# Altium PCB ControlBrickLogic2_1.PcbDoc
Units mm, origin at the board's own origin, x right, y up, seen from the top; angles counter-clockwise.
Board outline 37.75 x 63 mm, 2 copper layers (Top Layer, Bottom Layer); 40 components, 129 nets, 137 pads, 18 vias.
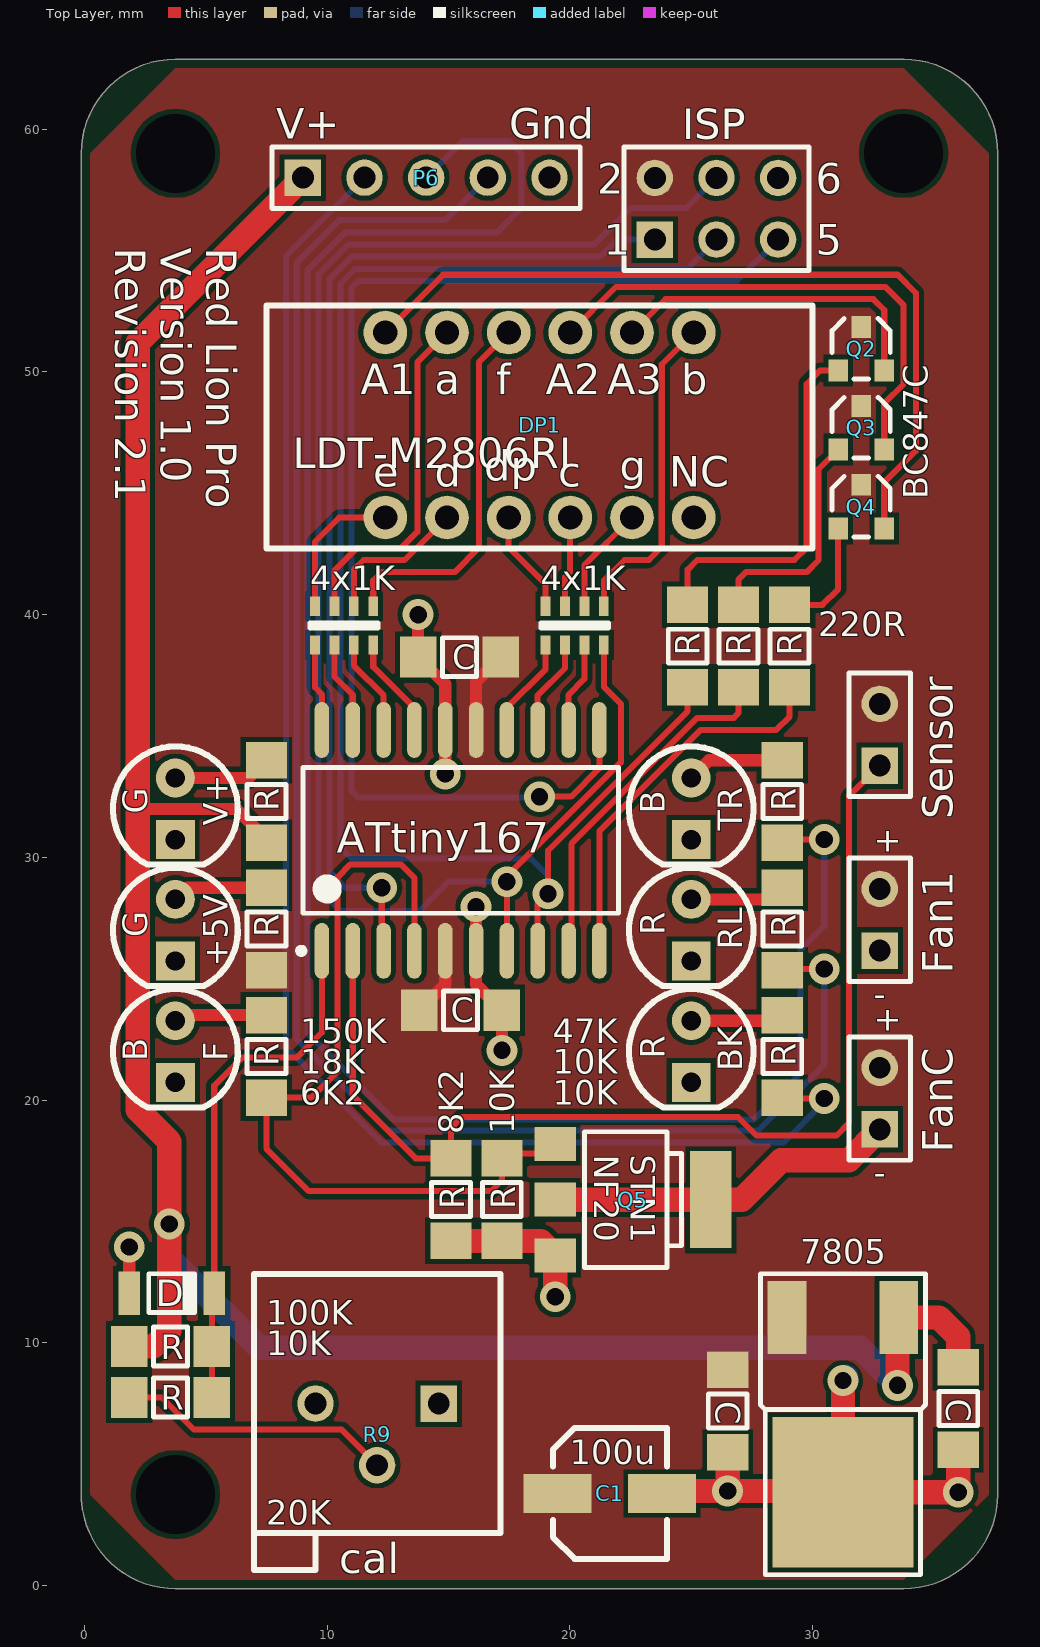
[diagram p0: Top Layer view]
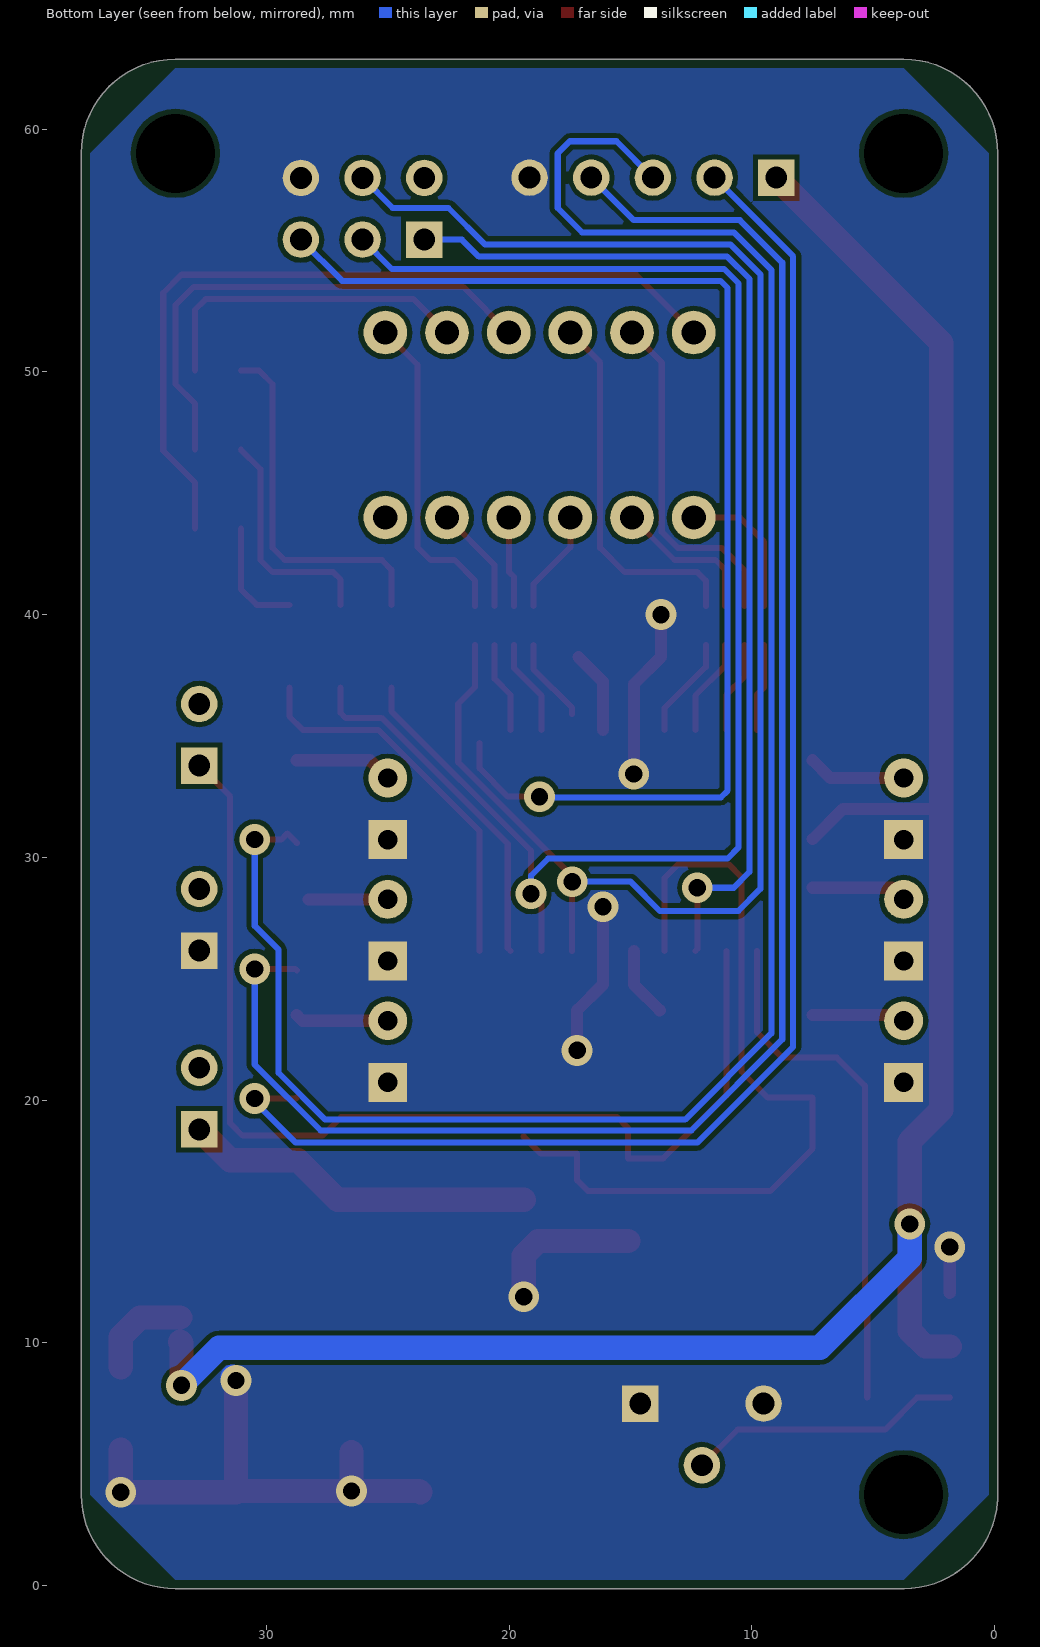
[diagram p1: Bottom Layer view, seen from below]

## Layer stack, top to bottom
Top Solder: solder mask 0.0102, Solder Resist, Dk 3.5
Top Layer: signal copper 0.0356
Dielectric 1: dielectric 0.32, FR-4, Dk 4.8
Bottom Layer: signal copper 0.0356
Bottom Solder: solder mask 0.0102, Solder Resist, Dk 3.5

## Board outline
-0.115,3.446 ccw(c3.75,3.75) 3.749,-0.127 ccw(c3.75,0) 3.75,-0.127 33.75,-0.127 ccw(c33.75,3.75) 37.627,3.75 37.627,59 ccw(c33.75,59) 33.751,62.877 ccw(c33.75,62.75) 33.75,62.877 3.75,62.877 ccw(c3.75,59) -0.127,59 -0.127,3.5 ccw(c0,3.5)

## Design rules (kind name [scope] priority, off if disabled: settings)
Clearance [All] p1: gap=0.2
ComponentClearance [All] p1 off: gap=0.254 collisioncheckmode=3 verticalgap=0.254 showdistances=FALSE
Height [All] p1 off: minheight=0 maxheight=25.4 prefheight=12.7
PlaneConnect [All] p1: planeconnectstyle=Direct reliefexpansion=0.508 reliefentries=4 reliefconductorwidth=0.254 reliefairgap=0.254
PolygonConnect [All] p1: connectstyle=Direct reliefconductorwidth=0.254 reliefentries=4 polygonreliefangle="90 Angle" airgapwidth=0.254
RoutingVias [All] p1: holewidth=0.711 width=1.27 viastyle="Through Hole" minholewidth=0.711 minwidth=1.27 maxholewidth=0.711 maxwidth=1.27
SolderMaskExpansion [All] p1: expansion=0.102
Width [All] p1: maxlimit=300 minlimit=0.01 preferedwidth=1
27 further rules are at their usual default settings.

## Components (designator, comment, footprint, x,y, rotation, side; value= is the part's Value field where it differs from the comment)
4x1K "1K" ResNet1206_8 9.5,38.75 r0 top (schematic designator R12)
4x1K "1K" ResNet1206_8 19,38.75 r0 top (schematic designator R13)
7805 "+5V" DPAK 31.25,3.85 r90 top (schematic designator VR1)
+5V "G" "LED 2.54" 3.75,27 r0 top locked (schematic designator D18)
ATtiny167 "ATtiny167-15SZ" 20TG_N 15.5,30.7 r90 top (schematic designator U1)
BK "R" "LED 2.54" 25,22 r0 top locked (schematic designator D21)
C "CapSMD" 1206 36,5.6 r90 top (schematic designator C2)
C "CapSMD" 1206 26.5,5.5 r90 top (schematic designator C3)
C "CapSMD" 1206 17.2,23.7 r180 top (schematic designator C4)
C "CapSMD" 1206 13.75,38.25 r0 top (schematic designator C5)
C1 "100u" "SMDcap 5mm" 19.5,3.8 r270 top
D "5.1V" MiniMELF 1.85,12.05 r0 top (schematic designator D16)
DP1 "LDT-M2806RI" LDT-M2806RI 12.4,44 r0 top locked
F "B" "LED 2.54" 3.75,22 r0 top locked (schematic designator D22)
Fan1 "Permanent Fan" HDR1X2 32.766,28.702 r270 top (schematic designator P7)
FanC "Switched Fan" HDR1X2 32.766,21.336 r270 top (schematic designator P10)
ISP "ISP" HDR2X3 23.5,55.45 r0 top (schematic designator P9)
P6 "Inwards" HDR1X5 9,58 r0 top locked
Q2 "BC847C" SOT23 32,49.5 r0 top
Q3 "BC847C" SOT23 32,46.25 r0 top
Q4 "BC847C" SOT23 32,43 r0 top
Q5 "Mosfet" SOT223 18.5,15.9 r270 top
R "100K" 1206 5.25,9.85 r180 top (schematic designator R4)
R "10K" 1206 1.85,7.75 r0 top (schematic designator R5)
R "ResSMD" 1206 24.85,37 r90 top (schematic designator R6)
R "ResSMD" 1206 26.95,37 r90 top (schematic designator R7)
R "220R" 1206 29.05,37 r90 top (schematic designator R8)
R "150K" 1206 7.5,34 r270 top (schematic designator R10)
R "18K" 1206 7.5,28.75 r270 top (schematic designator R11)
R "10K" 1206 28.75,23.5 r270 top (schematic designator R16)
R "10K" 1206 28.75,28.75 r270 top (schematic designator R14)
R "47K" 1206 28.75,34 r270 top (schematic designator R15)
R "8K2" 1206 15.1,14.2 r90 top (schematic designator R17)
R "10K" 1206 17.2,14.2 r90 top (schematic designator R18)
R "6K2" 1206 7.5,23.5 r270 top (schematic designator R19)
R9 "cal" Tr3296P 14.6,7.5 r180 top
RL "R" "LED 2.54" 25,27 r0 top locked (schematic designator D19)
Sensor "Thermistor" HDR1X2 32.766,36.322 r270 top (schematic designator P8)
TR "B" "LED 2.54" 25,32 r0 top locked (schematic designator D20)
V+ "G" "LED 2.54" 3.75,32 r0 top locked (schematic designator D17)

## Footprints (in the part's own frame and the unit in brackets; to place one, negate y for a bottom-side part, rotate by r counter-clockwise, add the part's x,y. Pads: shape width x height; smd on the part's side, far side on the other; paste and mask are expansions set on the pad)
20TG_N [mm] "SOIC, 20-Leads, Body 12.8x7.5mm, Pitch 1.27mm, IPC Medium Density"
  oval 2.3x0.6 smd: 1(-4.55,5.715) 2(-4.55,4.445) 3(-4.55,3.175) 4(-4.55,1.905) 5(-4.55,0.635) 6(-4.55,-0.635) 7(-4.55,-1.905) 8(-4.55,-3.175) 9(-4.55,-4.445) 10(-4.55,-5.715) 11(4.55,-5.715) 12(4.55,-4.445) 13(4.55,-3.175) 14(4.55,-1.905) 15(4.55,-0.635) 16(4.55,0.635) 17(4.55,1.905) 18(4.55,3.175) 19(4.55,4.445) 20(4.55,5.715)
  silkscreen extent -4.67,-6.5 3,6.69, body extent -3.75,-6.5 3.75,6.5, height 2.65
1206 [mm] "1206 Passive Component"
  rect 1.5x1.7 smd: 1(0,0) 2(3.4,0)
  silkscreen extent 1,-0.8 2.4,0.8
DPAK [mm] "DPAK w/out pin 2"
  rect 3x1.6 smd: 1(7.2,-2.3) 3(7.2,2.3)
  rect 6.2x5.8 smd: 2(0,0)
  silkscreen extent -3.4,-3.4 9,3.4
HDR1X2 [mm] "Connector; Header; 2 Position"
  round 1.5 hole 0.9: 1(0,0)
  rect 1.5x1.5 hole 0.9: 2(2.54,0)
  silkscreen extent -1.27,-1.27 3.81,1.27
HDR1X5 [mm] "Connector; Header; 5 Position"
  rect 1.5x1.5 hole 0.9: 1(0,0)
  round 1.5 hole 0.9: 2(2.54,0) 3(5.08,0) 4(7.62,0) 5(10.16,0)
  silkscreen extent -1.27,-1.27 11.43,1.27
HDR2X3 [mm] "Connector; Header; 3x2 Position"
  rect 1.5x1.5 hole 0.9: 1(0,0)
  round 1.5 hole 0.9: 2(0,2.54) 3(2.54,0) 4(2.54,2.54) 5(5.08,0) 6(5.08,2.54)
  silkscreen extent -1.27,-1.27 6.35,3.81
LDT-M2806RI [mm] "7-Segment Display"
  round 1.8 hole 1: 1(0,0) 2(2.54,0) 3(5.08,0) 4(7.62,0) 5(10.16,0) 6(12.7,0) 7(12.7,7.62) 8(10.16,7.62) 9(7.62,7.62) 10(5.08,7.62) 11(2.54,7.62) 12(0,7.62)
  silkscreen extent -4.9,-1.27 17.6,8.73
"LED 2.54" [mm] "LED; 2 Leads"
  round 1.6 hole 0.8: 1(0,1.27)
  rect 1.6x1.6 hole 0.8: 2(0,-1.27)
  silkscreen extent -2.57,-2.3 2.57,2.57
MiniMELF [mm] "MiniMELF"
  rect 0.9x1.8 smd: 1(0,0) 2(3.5,0)
  silkscreen extent 0.8,-0.8 2.7,0.8
ResNet1206_8 [mm] "Resistor Network 1206 8 pins"
  rect 0.4x0.8 smd: 1(0,0) 2(0.8,0) 3(1.6,0) 4(2.4,0) 5(2.4,1.6) 6(1.6,1.6) 7(0.8,1.6) 8(0,1.6)
  silkscreen extent -0.2,0.7 2.6,0.9
"SMDcap 5mm" [mm] "Electrolytic 5mm SMD cap"
  rect 1.6x2.8 smd: 1(0,0) 2(0,4.3)
  silkscreen extent -2.7,-0.2 2.7,4.5
SOT23 [mm] "SOT23 SMD package"
  rect 0.8x0.9 smd: 1(-0.95,0.55) 2(0.95,0.55) 3(0,2.35)
  silkscreen extent -1.2,0.2 1.2,2.7
SOT223 [mm] "SOT223"
  rect 1.4x1.7 smd: 1(-2.3,0.9) 2(0,0.9) 3(2.3,0.9)
  rect 4x1.7 smd: 4(0,7.3)
  silkscreen extent -2.8,2.1 2.8,6.1
Tr3296P [mm] "Bourns 3296 3/8 Trimmer type P"
  rect 1.5x1.5 hole 0.9: 1(0,0)
  round 1.5 hole 0.9: 2(2.54,2.54) 3(5.08,0)
  silkscreen extent -2.54,-5.33 7.62,6.86

## Part data
4x1K 4x1K: library part ResNet4, "Isolated Resistor Network"
7805: library part "Volt Reg", "Voltage Regulator"
+5V BK F RL TR V+: library part LED1, "Typical RED GaAs LED"
ATtiny167: "8-bit Automotive AVR Microcontroller, 16KB Flash, 512 Bytes EEPROM, 512 Bytes SRAM, Automotive Grade (-40°C to +125°C), 20-Pin SOIC"
C C C C: "Capacitor"
C1: library part "Cap Pol2", "Polarized Capacitor (Axial)"
D: library part "D Zener", "Zener Diode"
DP1: library part 7Seg
Fan1 FanC Sensor: library part "Header 2", "Header, 2-Pin"
ISP: library part "Header 3X2", "Header, 3-Pin, Dual row"
P6: library part "Header 5", "Header, 5-Pin"
Q2 Q3 Q4: "NPN General Purpose Amplifier"
Q5: library part STN1NF20, "N-Channel MOSFET, SOT223"
R R R R R R R R R R R: library part ResSMD, "Resistor"
R R: "Resistor"
R9: library part RPot, "Potentiometer"

## Free pads (board coordinates)
  round 2.5 hole 3.25: 2(3.75,3.75)
  round 0 hole 3.25: 3(3.75,59) 4(33.75,59)

## Via types
v1: diameter 1.27, hole 0.711, Top Layer to Bottom Layer, 18 vias

## Nets (pads, with @x,y where several pads share a name; then routed paths per layer and width w, separated by ;. In a path a pad name is that pad's centre, name@x,y a point inside that pad or via, vN(x,y) a via of type N, cw(c..) or ccw(c..) an arc to the next point about the centre after c; other vN are vias at no path point)
+5V: 7805.3 ATtiny167.5 ATtiny167.15 C1.1 C.2@13.8,23.7 C.2@17.15,38.25 C.2@26.5,8.9 Fan1.1 FanC.1 ISP.2 Q2.3 Q3.3 Q4.3 R.2@7.5,25.35 Sensor.1 | length 6.3
  Top Layer w0.5: C.2@13.8,23.7 14.865,24.765 ATtiny167.5 ; ATtiny167.15 16.135,37.235 C.2@17.15,38.25
GND: 7805.2 +5V.2 ATtiny167.6 ATtiny167.16 BK.2 C1.2 C.1 D.1 F.2 Fan1.2 ISP.6 P6.5 Q5.3 R9.1 R9.3 R.1@15.1,14.2 R.1@17.2,14.2 RL.2 TR.2 V+.2 | length 42.1
  Top Layer w0.5: D.1 v1(1.85,13.95) ; v1(13.75,40) 13.75,38.25 14.865,37.135 ATtiny167.16 v1(14.865,33.435) ; v1(16.135,27.965) ATtiny167.6 16.135,24.765 17.2,23.7 v1(17.2,22.05)
  Top Layer w1: R.1@15.1,14.2 17.2,14.2 18.8,14.2 Q5.3 v1(19.4,11.9) ; C1.2@23.65,3.85 23.7,3.9 v1(26.5,3.9) ; C.1@26.5,5.5 v1(26.5,3.9) ; v1(31.25,8.45) 7805.2 ; C.1@36,5.6 v1(36,3.85) 7805.2 ; v1(26.5,3.9) 31.2,3.9 7805.2
  Bottom Layer w0.5: v1(14.865,33.435) v1@14.9,33.4
  Bottom Layer w1: v1(31.25,8.45) v1@31.4,8.6
NetD1_1: 
NetD1_2: 
NetD2_1: 
NetD2_2: 
NetD3_1: 
NetD3_2: 
NetD4_1: 
NetD4_2: 
NetD5_1: 
NetD5_2: 
NetD6_2: 
NetD8_1: 
NetD10_1: 
NetD12_2: 
NetD13_2: 
NetD14_2: 
NetD15_1: 
NetD16_2: ATtiny167.1 D.2 R.1@5.25,9.85 R.2@5.25,7.75 | length 21.6
  Top Layer w0.25: R.2@5.25,7.75 5.25,11.95 D.2 5.35,20.6 6.5,21.75 8.75,21.75 9.785,22.785 ATtiny167.1
NetD17_1: R.1@28.75,28.75 RL.1 | length 3.3
  Top Layer w0.5: RL.1 R.1@28.27,28.27
NetD18_1: R.1@28.75,34 TR.1 | length 4.1
  Top Layer w0.5: TR.1 25.73,34 R.1@28.75,34
NetD19_1: BK.1 R.1@28.75,23.5 | length 3.8
  Top Layer w0.5: BK.1 28.52,23.27 R.1@28.75,23.5
NetD20_1: R.1@7.5,34 V+.1 | length 4.1
  Top Layer w0.5: V+.1 6.77,33.27 R.1@7.5,34
NetD21_1: +5V.1 R.1@7.5,28.75 | length 3.9
  Top Layer w0.5: +5V.1 4.23,28.75 R.1@7.5,28.75
NetD22_1: F.1 R.1@7.5,23.5 | length 3.8
  Top Layer w0.5: F.1 3.98,23.5 R.1@7.5,23.5
NetDP1_1: 4x1K.8@9.5,40.35 DP1.1 | length 6
  Top Layer w0.25: 4x1K.8@9.5,40.35 9.5,43 10.5,44 DP1.1
NetDP1_2: 4x1K.6@11.1,40.35 DP1.2 | length 6.2
  Top Layer w0.25: 4x1K.6@11.1,40.35 11.1,41.85 11.5,42.25 13.19,42.25 DP1.2
NetDP1_3: 4x1K.8@19,40.35 DP1.3 | length 4.3
  Top Layer w0.25: DP1.3 17.48,42.77 19,41.25 4x1K.8@19,40.35
NetDP1_4: 4x1K.7@19.8,40.35 DP1.4 | length 3.7
  Top Layer w0.25: 4x1K.7@19.8,40.35 19.8,41.55 20,41.75 20,43.98 DP1.4
NetDP1_5: 4x1K.6@20.6,40.35 DP1.5 | length 4.5
  Top Layer w0.25: 4x1K.6@20.6,40.35 20.6,42.04 DP1.5
NetDP1_7: 4x1K.5@21.4,40.35 DP1.7 | length 13.4
  Top Layer w0.25: 4x1K.5@21.4,40.35 21.4,41.4 22.25,42.25 23.25,42.25 23.785,42.785 23.785,50.305 DP1.7
NetDP1_8: DP1.8 Q2.2 | length 13.6
  Top Layer w0.25: DP1.8 23.94,53 32.5,53 32.95,52.55 Q2.2
NetDP1_9: DP1.9 Q3.2 | length 21.1
  Top Layer w0.25: DP1.9 21.9,53.5 33,53.5 33.75,52.75 33.75,49.5 32.95,48.7 Q3.2
NetDP1_10: 4x1K.5@11.9,40.35 DP1.10 | length 15.3
  Top Layer w0.25: 4x1K.5@11.9,40.35 11.9,41.4 12.25,41.75 15.25,41.75 16.25,42.75 16.25,50.39 DP1.10
NetDP1_11: 4x1K.7@10.3,40.35 DP1.11 | length 14.2
  Top Layer w0.25: 4x1K.7@10.3,40.35 10.3,41.8 11.25,42.75 13.054,42.75 13.715,43.411 13.715,50.395 DP1.11
NetDP1_12: DP1.12 Q4.2 | length 33.4
  Top Layer w0.25: DP1.12 14.78,54 33.5,54 34.25,53.25 34.25,46.75 32.95,45.45 Q4.2
NetP1_3: 
NetP2_1: 
NetP2_3: 
NetP3_1: 
NetP4_1: 
NetP4_4: 
NetP5_1: 
NetP5_2: 
NetP5_3: 
NetP5_4: 
NetP6_2: ATtiny167.2 R.2@15.1,17.6 Sensor.2 | length 44.7
  Top Layer w0.25: ATtiny167.2 11.055,20.195 13.65,17.6 15.1,17.6 15.1,18.85 15.554,19.304 26.924,19.304 27.686,18.542 30.988,18.542 31.496,19.05 31.496,32.512 Sensor.2
NetP8_2: P6.2 R.2@28.75,20.1 | length 63.8
  Top Layer w0.25: R.2@28.75,20.1 28.784,20.066 v1(30.48,20.066)
  Bottom Layer w0.25: P6.2 8.3,54.76 8.3,22.2 12.25,18.25 28.8,18.25 30.48,19.93 v1(30.48,20.066) 30.684,20.066 v1@30.75,20
NetP8_3: P6.3 R.2@28.75,30.6 | length 82.9
  Top Layer w0.25: R.2@28.75,30.6 29.138,30.988 29.392,30.734 v1(30.48,30.734)
  Bottom Layer w0.25: P6.3 15.58,59.5 17.5,59.5 18,59 18,56.75 17,55.75 10.75,55.75 9.2,54.2 9.2,22.75 12.75,19.2 27.582,19.2 29.5,21.118 29.5,26.198 30.48,27.178 v1(30.48,30.734)
NetP8_4: P6.4 R.2@28.75,25.35 | length 71.4
  Top Layer w0.25: R.2@28.75,25.35 28.8,25.4 v1(30.48,25.4)
  Bottom Layer w0.25: P6.4 14.87,56.25 10.5,56.25 8.75,54.5 8.75,22.5 12.5,18.75 27.768,18.75 30.48,21.462 v1(30.48,25.4)
NetP9_2: FanC.2 Q5.2 Q5.4 | length 14.6
  Top Layer w1: Q5.2 Q5.4 27.076,15.9 28.702,17.526 31.496,17.526 FanC.2
NetP10_1: ATtiny167.3 ISP.1 | length 43.5
  Top Layer w0.25: v1(12.25,28.75) 12.25,26.225 ATtiny167.3
  Bottom Layer w0.25: v1(12.25,28.75) 10.75,28.75 10.1,29.4 10.1,53.827 11.023,54.75 21.25,54.75 21.95,55.45 ISP.1
NetP10_3: ATtiny167.8 ISP.3 R.1@24.85,37 | length 62.7
  Top Layer w0.25: ATtiny167.8 18.675,28.075 v1(19.1,28.5) 19.1,30.276 24.85,36.026 R.1@24.85,37
  Bottom Layer w0.25: v1(19.1,28.5) 19.1,29.245 18.39,29.955 11.005,29.955 10.55,30.41 10.55,53.641 11.148,54.239 24.829,54.239 ISP.3
NetP10_4: 4x1K.4@21.4,38.75 ATtiny167.7 ISP.4 | length 67.7
  Top Layer w0.25: ATtiny167.7 v1(17.405,28.995) 17.405,29.217 22.098,33.91 22.098,36.322 21.4,37.02 4x1K.4@21.4,38.75
  Bottom Layer w0.25: v1(17.405,28.995) 17.405,28.941 17.596,28.75 v1@17.673,28.827 ; v1@17.75,28.904 v1@17.673,28.827 ; ISP.4 24.8,56.75 22.5,56.75 21,55.25 10.886,55.25 9.65,54.014 9.65,28.704 10.564,27.79 13.79,27.79 15,29 17.5,29 v1@17.673,28.827
NetP10_5: ATtiny167.11 ISP.5 | length 51.2
  Top Layer w0.25: v1(18.75,32.5) 20.051,32.5 21.215,33.664 ATtiny167.11@21.215,34.715
  Bottom Layer w0.25: v1@18.75,32.475 11.275,32.475 11,32.75 11,53.454 11.296,53.75 26.88,53.75 ISP.5 ; v1(18.75,32.5) 18.95,32.5 v1@18.975,32.475
NetP12_1: 
NetP12_2: 
NetP12_3: 
NetP12_4: 
NetP12_5: 
NetP12_6: 
NetP12_7: 
NetP12_8: 
NetP12_9: 
NetP12_10: 
NetP12_11: 
NetP12_12: 
NetP12_13: 
NetP12_14: 
NetP12_15: 
NetP12_16: 
NetP12_17: 
NetP12_18: 
NetP12_19: 
NetP12_20: 
NetP12_21: 
NetP12_22: 
NetP12_23: 
NetP12_24: 
NetP12_25: 
NetP12_26: 
NetP13_1: 
NetP13_2: 
NetP13_3: 
NetP13_4: 
NetP13_5: 
NetP13_6: 
NetP13_7: 
NetP13_8: 
NetP13_9: 
NetP13_10: 
NetP13_11: 
NetP13_12: 
NetP13_13: 
NetP13_14: 
NetP13_15: 
NetP13_16: 
NetP13_17: 
NetP13_18: 
NetP13_19: 
NetP13_20: 
NetP13_21: 
NetP13_22: 
NetP13_23: 
NetP13_24: 
NetP13_25: 
NetP13_26: 
NetP14_1: 
NetP16_1: 
NetP17_1: 
NetP18_5: 
NetP18_6: 
NetQ2_1: Q2.1 R.2@24.85,40.4 | length 15
  Top Layer w0.25: R.2@24.85,40.4 24.85,41.85 25.25,42.25 29.25,42.25 29.75,42.75 29.75,49.5 30.3,50.05 Q2.1
NetQ3_1: Q3.1 R.2@26.95,40.4 | length 9.6
  Top Layer w0.25: R.2@26.95,40.4 26.95,41.45 27.25,41.75 29.75,41.75 30.25,42.25 30.25,46 Q3.1
NetQ4_1: Q4.1 R.2@29.05,40.4 | length 4.8
  Top Layer w0.25: R.2@29.05,40.4 30.4,40.4 31.05,41.05 Q4.1
NetQ5_1: ATtiny167.4 Q5.1 R.2@7.5,20.1 R.2@17.2,17.6 | length 34.3
  Top Layer w0.25: ATtiny167.4 13.595,29.155 13.04,29.71 10.96,29.71 10.43,29.18 10.43,21.18 9.35,20.1 7.5,20.1 7.5,18 9.25,16.25 16.75,16.25 17.2,16.7 17.2,17.6 17.2,17.8 18.7,17.8 Q5.1@19.4,18.5
NetR5_1: R9.2 R.1@1.85,7.75 | length 11.4
  Top Layer w0.25: R.1@1.85,7.75 3.19,7.75 4.515,6.425 10.595,6.425 R9.2
NetR8_1: ATtiny167.9 R.1@26.95,37 | length 14.6
  Top Layer w0.25: ATtiny167.9 20.06,26.265 20.06,30.557 25.253,35.75 26.75,35.75 26.95,35.95 R.1@26.95,37
NetR9_1: ATtiny167.10 R.1@29.05,37 | length 15.9
  Top Layer w0.25: ATtiny167.10 21.215,31.076 25.389,35.25 28.5,35.25 29.05,35.8 R.1@29.05,37
NetR11_1: 4x1K.1@9.5,38.75 ATtiny167.20 | length 3.6
  Top Layer w0.25: 4x1K.1@9.5,38.75 9.5,37 9.785,36.715 ATtiny167.20
NetR11_2: 4x1K.2@10.3,38.75 ATtiny167.19 | length 3.8
  Top Layer w0.25: 4x1K.2@10.3,38.75 10.3,37.45 11.055,36.695 ATtiny167.19
NetR11_3: 4x1K.3@11.1,38.75 ATtiny167.18 | length 4
  Top Layer w0.25: 4x1K.3@11.1,38.75 11.1,37.9 12.325,36.675 ATtiny167.18
NetR11_4: 4x1K.4@11.9,38.75 ATtiny167.17 | length 4.2
  Top Layer w0.25: 4x1K.4@11.9,38.75 11.9,37.85 13.595,36.155 ATtiny167.17
NetR17_1: 4x1K.1@19,38.75 ATtiny167.14 | length 3.5
  Top Layer w0.25: ATtiny167.14@17.405,35.905 17.405,36.155 19,37.75 4x1K.1@19,38.75
NetR17_2: 4x1K.2@19.8,38.75 ATtiny167.13 | length 4
  Top Layer w0.25: ATtiny167.13 18.675,36.675 19.8,37.8 4x1K.2@19.8,38.75
NetR17_3: 4x1K.3@20.6,38.75 ATtiny167.12 | length 3.8
  Top Layer w0.25: ATtiny167.12 19.945,36.695 20.6,37.35 4x1K.3@20.6,38.75
NetRE1_6: 
V+: 7805.1 C.2@36,9 P6.1 R.2@1.85,9.85 R.2@7.5,30.6 | length 98
  Top Layer w0.5: 2.2,32 6.25,32 R.2@7.5,30.75
  Top Layer w1: R.2@1.85,9.85 2.85,9.85 3.5,10.5 v1(3.5,14.9) 3.5,18.3 2.2,19.6 2.2,32 2.2,51.2 P6.1 ; v1(33.5,8.25) 33.5,10 7805.1@33.55,10.05 ; 7805.1 35.2,11.05 36,10.25 C.2@36,9
  Bottom Layer w1: v1(3.5,14.9) 3.5,13.5 7.2,9.8 31.95,9.8 v1(33.5,8.25)
pads on no net: DP1.6

## Polygon pours and split planes (outlines as drawn)
GND on Bottom Layer "GND_L02_P014" (solid, pour order 14): 0.25,3.75 3.75,0.25 33.75,0.25 37.25,3.75 37.25,58.75 37.25,59 33.75,62.5 3.75,62.5 0.25,59
+5V on Top Layer "+5V_L01_P016" (solid, pour order 16): 0.25,59 3.75,62.5 33.75,62.5 37.25,59 37.25,3.75 35.5,2 33.75,0.25 3.75,0.25 0.25,3.75

## Silkscreen, mask and mechanical layers (free items; w line width, h text height)
Top Overlay:
  text "V+" at 7.9,59.6 h1.25
  text "Gnd" at 17.5,59.6 h1.25
  text "Red Lion Pro / Version 1.0 / Revision 2.1" at 1.27,55.118 h1.25 r270
  text "+" at 32.512,30.226 h1
  text "-" at 32.512,23.876 h1
  text "+" at 32.512,22.86 h1
  text "STN1 / NF20" at 21,17.75 h1 r270
  text "-" at 32.512,16.51 h1
  text "20K" at 7.5,2.5 h1
Mechanical 1:
  lines w0.254: 0,3.5 0,59 cw(c3.75,59) 3.75,62.75 33.75,62.75 cw(c33.75,59) 37.5,59 37.5,3.75 cw(c33.75,3.75) 33.75,0 3.75,0 cw(c3.75,3.75) 0,3.75

## Text inside footprints (layer, text, board x,y; h text height)
DP1: Top Overlay "A1" at 11.384,49.08 h1.25; Top Overlay "A2" at 19.004,49.08 h1.25; Top Overlay "A3" at 21.544,49.08 h1.25; Top Overlay "a" at 14.432,49.08 h1.25; Top Overlay "b" at 24.592,49.08 h1.25; Top Overlay "c" at 19.512,45.27 h1.25; Top Overlay "d" at 14.432,45.27 h1.25; Top Overlay "e" at 11.892,45.27 h1.25; Top Overlay "f" at 16.972,49.08 h1.25; Top Overlay "g" at 22.052,45.524 h1.25; Top Overlay "dp" at 16.464,45.524 h1.25; Top Overlay "NC" at 24.084,45.27 h1.25
ISP: Top Overlay "1" at 21.386,54.828 h1.25; Top Overlay "2" at 21.136,57.328 h1.25; Top Overlay "5" at 30.136,54.828 h1.25; Top Overlay "6" at 30.136,57.328 h1.25